# Altium PCB air_quality_monitoring.PcbDoc
Units mm, origin at the board's own origin, x right, y up, seen from the top; angles counter-clockwise.
Board outline 101.85 x 104.27 mm, 2 copper layers (Top Layer, Bottom Layer); 20 components, 17 nets, 161 pads, 6 vias.
Unrouted connection lines stored in the file: 1.
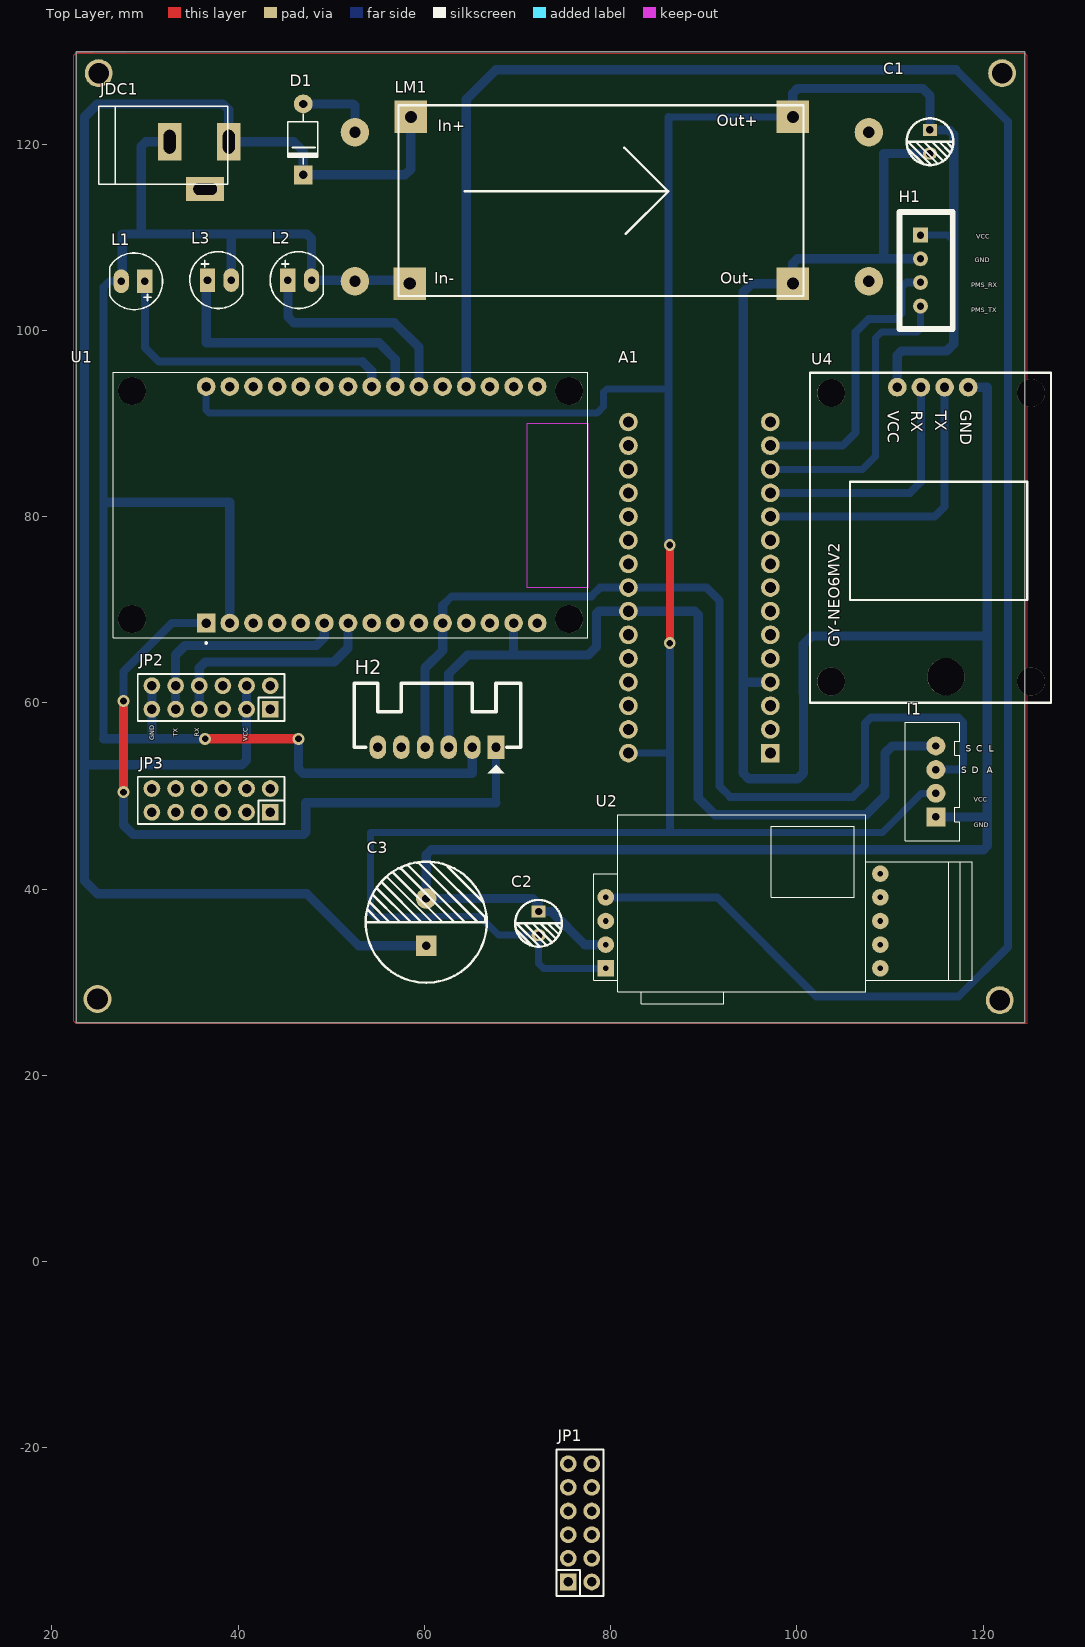
[diagram p0: Top Layer view]
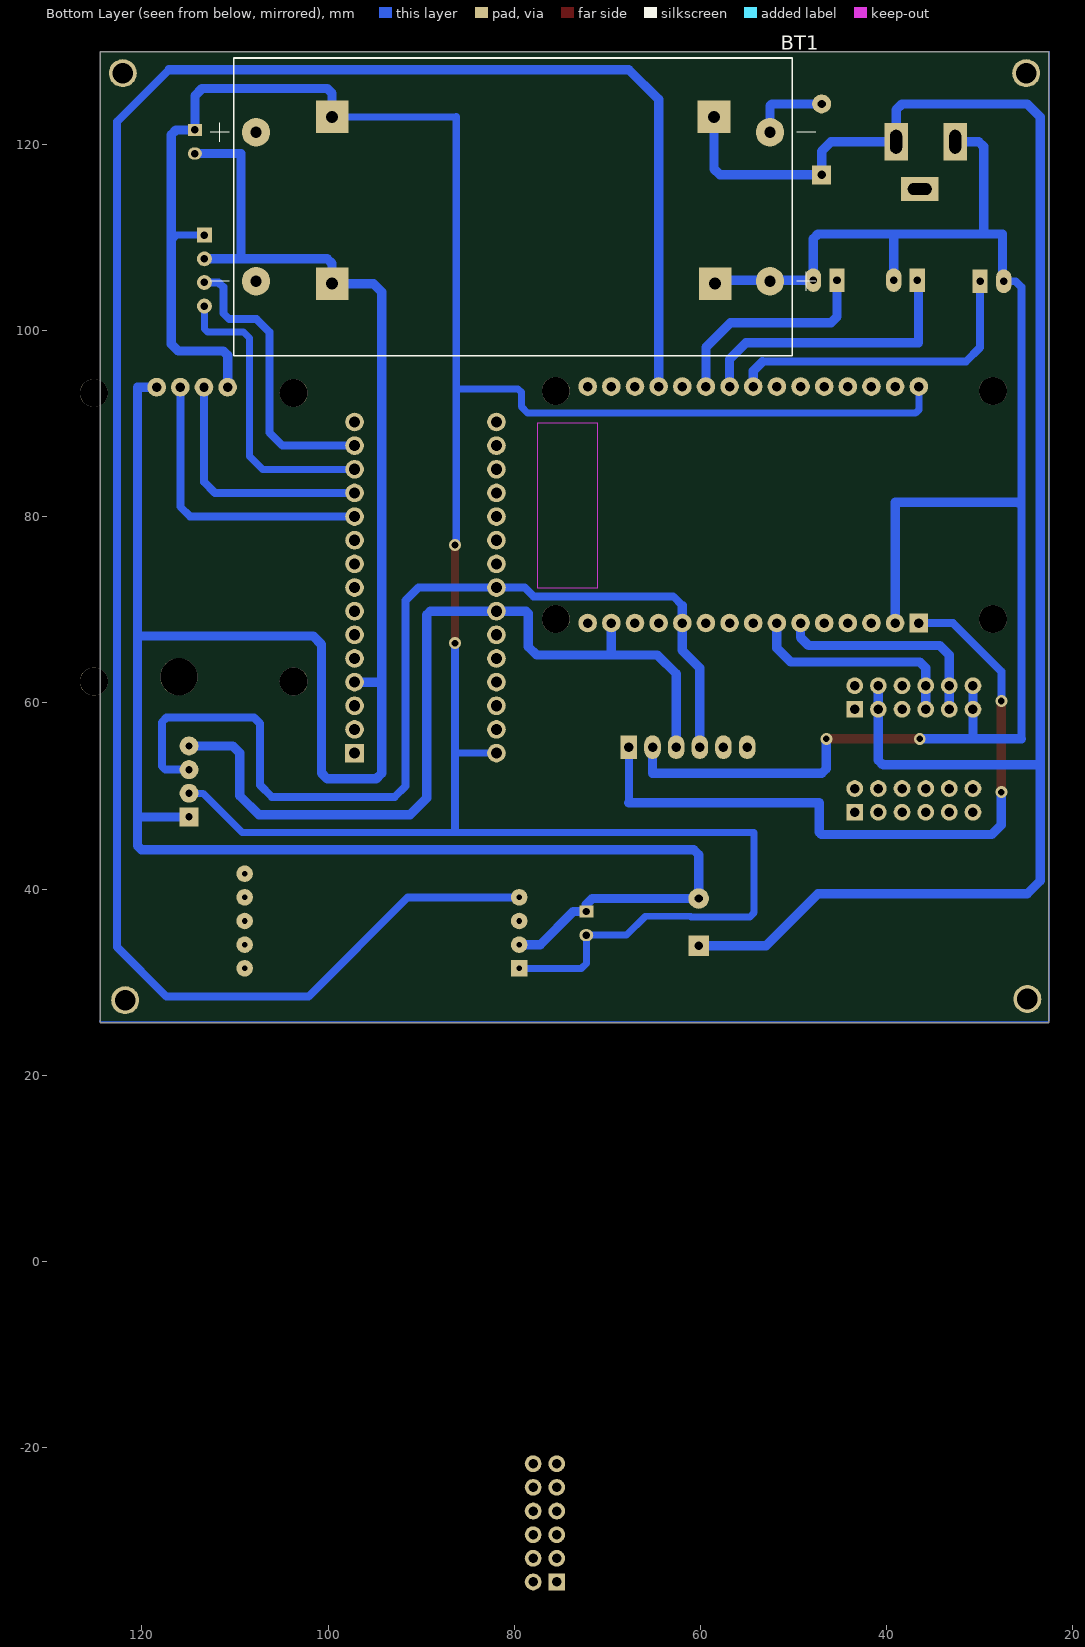
[diagram p1: Bottom Layer view, seen from below]

## Layer stack, top to bottom
Top Solder: solder mask 0.0102, Solder Resist, Dk 3.5
Top Layer: signal copper 0.0356
Dielectric 1: dielectric 0.32, FR-4, Dk 4.8
Bottom Layer: signal copper 0.0356
Bottom Solder: solder mask 0.0102, Solder Resist, Dk 3.5

## Board outline
22.606,25.654 124.46,25.654 124.46,129.921 22.606,129.921

## Design rules (kind name [scope] priority, off if disabled: settings)
Clearance [All] p1: gap=1 ignorepadtopadclearanceinfootprint=FALSE
PolygonConnect [All] p1: connectstyle=Relief reliefconductorwidth=0.254 reliefentries=4 polygonreliefangle="90 Angle" airgapwidth=0.254
RoutingVias [All] p1: holewidth=0.711 width=1.27 viastyle="Through Hole" minholewidth=0.711 minwidth=1.27 maxholewidth=0.711 maxwidth=1.27
SolderMaskExpansion [All] p1: expansion=0.102
Width [All] p1: maxlimit=1 minlimit=0.75 preferedwidth=0.85
30 further rules are at their usual default settings.

## Classes and differential pairs
component class Sheet1: A1 BT1 C1 C2 C3 D1 H2 I1 JDC1 JP2 L1 L2 L3 LM1 U1 U2 U4

## Components (designator, comment, footprint, x,y, rotation, side; value= is the part's Value field where it differs from the comment)
A1 "Arduino Nano" "Arduino Nano" 103.505,52.832 r90 top
BT1 "18650" "DE PIN 18650 X2" 80.137,113.284 r180 bottom
C1 "1000uF" "tu hoa 5mm" 114.3,120.269 r270 top
C2 "100uF" "tu hoa 5mm" 72.263,36.322 r270 top
C3 "1000uF" "tu hoa 13mm" 60.198,36.449 r90 top
D1 "100v" "DIODE 1A" 46.99,125.603 r90 top
H1 "PMS7003" XH2.54M-4 113.284,110.236 r270 top
H2 "BMP280" "Header 6P DC 2.54" 67.691,55.245 r90 top
I1 "LCD" "HEADER 4" 114.935,47.752 r90 top
JDC1 "Jac DC" DC-IN 35.814,117.729 r0 top
JP1 "AC7682S" "JP 2x6 CT" 76.708,-28.067 r90 top
JP2 "AC7682S" "JP 2x6 CT" 37.084,60.579 r180 top
JP3 "AC7682S" "JP 2x6 CT" 37.084,49.53 r180 top (schematic designator JP2)
L1 "LED 5mm" LED-5MM-BLUE 28.829,105.283 r180 top
L2 "LED 5mm" LED-5MM-BLUE 46.482,105.41 r0 top
L3 "LED 5mm" LED-5MM-BLUE 37.846,105.41 r0 top
LM1 "LM2596-Adj" lm2596 75.057,111.887 r0 top
U1 "DEVKIT_V1_ESP32-WROOM-32" MODULE_DEVKIT_V1_ESP32-WROOM-32 52.07,81.28 r90 top
U2 "MH-Z19B" MH-Z19B 79.477,31.496 r0 top
U4 "NEO6M" NEO6M 114.427,78.105 r180 top

## Footprints (in the part's own frame and the unit in brackets; to place one, negate y for a bottom-side part, rotate by r counter-clockwise, add the part's x,y. Pads: shape width x height; smd on the part's side, far side on the other; paste and mask are expansions set on the pad)
"Arduino Nano" [mm]
  rect 2x2 hole 1.2: 0(1.778,6.35)
  round 2 hole 1.2: 1(4.318,6.35) 2(6.858,6.35) 3(9.398,6.35) 4(11.938,6.35) 5(14.478,6.35) 6(17.018,6.35) 7(19.558,6.35) 8(22.098,6.35) 9(24.638,6.35) 10(27.178,6.35) 11(29.718,6.35) 12(32.258,6.35) 13(34.798,6.35) 14(37.338,6.35) 15(37.338,21.59) 16(34.798,21.59) 17(32.258,21.59) 18(29.718,21.59) 19(27.178,21.59) 20(24.638,21.59) 21(22.098,21.59) 22(19.558,21.59) 23(17.018,21.59) 24(14.478,21.59) 25(11.938,21.59) 26(9.398,21.59) 27(6.858,21.59) 28(4.318,21.59) 29(1.778,21.59)
  body extent -2.04,4.97 42.96,22.97, height 13.1
DC-IN [mil] "Jac DC input"
  rect 100x160 hole 50 slot 100 at 90 deg: 1(125,100) 2(-125,100)
  rect 160x100 hole 50 slot 100 at 0 deg: 3(25,-100)
  silkscreen extent -425,-80 120,250, body extent -410,-105 134,269, height 434
"DE PIN 18650 X2" [mil] "2-cell AA battery holder"
  round 120 hole 48: 1(-1086.61,314.96) 1(1086.61,314.96) 2(-1086.61,-314.96) 2(1086.61,-314.96)
  silkscreen extent -1280,-630 1280,630, body extent -1181,-630 1181,630, height 657
"DIODE 1A" [mil] "Diode 1A"
  round 80 hole 35: 1(-50,0)
  rect 80x80 hole 35: 2(-350,0)
  silkscreen extent -305,-61 -95,65, body extent -366,-61 -34,65, height 122
"HEADER 4" [mil]
  rect 80x80 hole 31.5: 1(0,0)
  round 80 hole 31.5: 2(100,0) 3(200,0) 4(300,0)
  silkscreen extent -100,-100 400,130, body extent -94,-92 394,134, height 276
"Header 6P DC 2.54" [mil]
  rect 100x70 hole 40: 1(0,0)
  oval 100x70 hole 40: 2(0,100) 3(0,200) 4(0,300) 5(0,400) 6(0,500)
  silkscreen extent -110,-105 270,600, body extent -7,-110 278,605, height 227
"JP 2x6 CT" [mm] "12 pins, dual row, straight, gold plating"
  rect 1.8x1.8 hole 1.02: 1(-6.35,1.27)
  round 1.8 hole 1.02: 2(-3.81,1.27) 3(-1.27,1.27) 4(1.27,1.27) 5(3.81,1.27) 6(6.35,1.27) 7(6.35,-1.27) 8(3.81,-1.27) 9(1.27,-1.27) 10(-1.27,-1.27) 11(-3.81,-1.27) 12(-6.35,-1.27)
  silkscreen extent -7.87,-2.54 7.87,2.54, body extent -7.87,-2.54 7.87,2.54, height 8.51
LED-5MM-BLUE [mil] "LED 2 PIN, 5 ly , Only colour, pin to pin 110mil"
  rect 65x100 hole 32: 1(-45,0)
  oval 65x100 hole 32: 2(55,0)
  silkscreen extent -120,-120 104,120, body extent -113,-120 100,117, height 339
lm2596 [mm]
  rect 3.5x3.5 hole 1.3: 1(-16.51,11.049) 2(-16.637,-6.858) 3(24.511,-6.858) 4(24.511,11.049)
  silkscreen extent -17.85,-8.18 25.65,12.32, body extent -17.81,-8.21 25.69,12.79, height 13.68
MH-Z19B [mil]
  round 70 hole 23.62: AOT(0,200) GND(0,100) HD(1161,400) PWM(0,300) RX(1161,100) SR(1161,300) TX(1161,200) VO(1161,0)
  rect 70x70 / inner round 70 / far side rect 70x70 hole 23.62: VIN(0,0)
  silkscreen extent -50,-150 1550,650, body extent 0,-346 1282,331, height 690
MODULE_DEVKIT_V1_ESP32-WROOM-32 [mm]
  rect 2x2 hole 1.02 mask+0.102: 1(-12.7,15.515)
  round 2 hole 1.02 mask+0.102: 2(-12.7,12.975) 3(-12.7,10.435) 4(-12.7,7.895) 5(-12.7,5.355) 6(-12.7,2.815) 7(-12.7,0.275) 8(-12.7,-2.265) 9(-12.7,-4.805) 10(-12.7,-7.345) 11(-12.7,-9.885) 12(-12.7,-12.425) 13(-12.7,-14.965) 14(-12.7,-17.505) 15(-12.7,-20.045) 16(12.7,-20.045) 17(12.7,-17.505) 18(12.7,-14.965) 19(12.7,-12.425) 20(12.7,-9.885) 21(12.7,-7.345) 22(12.7,-4.805) 23(12.7,-2.265) 24(12.7,0.275) 25(12.7,2.815) 26(12.7,5.355) 27(12.7,7.895) 28(12.7,10.435) 29(12.7,12.975) 30(12.7,15.515)
  round 3 hole 3 unplated mask+0: ""(-12.28,23.475) ""(-12.28,-23.475) ""(12.23,23.475) ""(12.23,-23.475)
  Keep-Out Layer region: 8.78,-25.475 -8.91,-25.475 -8.91,-18.985 8.78,-18.985
  Keep-Out Layer region: 8.78,-25.475 -8.91,-25.475 -8.91,-18.985 8.78,-18.985
  silkscreen extent -14.95,-25.48 14.23,25.48, body extent -13.97,-24.8 13.97,30.3, height 6.69
NEO6M [mm]
  round 2 hole 1 paste-2539.97 mask+0.051: 1(-3.983,-15.806) 2(-1.443,-15.806) 3(1.097,-15.806) 4(3.637,-15.806)
  round 3 hole 3 unplated paste-2539.97: ""(-10.732,15.806) ""(-10.731,-15.182) ""(10.731,15.806) ""(10.732,-15.182)
  round 4 hole 4 unplated paste-2539.97: ""(-1.588,15.298)
  silkscreen extent -12.87,-17.34 13.02,18.1, body extent -12.98,-17.47 13.1,18.13, height 13.42
"tu hoa 5mm" [mm]
  rect 1.3x1.5 hole 0.8: 1(-1.27,0)
  oval 1.3x1.5 hole 0.8: 2(1.27,0)
  silkscreen extent -2.51,-2.51 2.51,2.51, body extent -3.12,-3.18 3.23,3.18, height 14.55
"tu hoa 13mm" [mm]
  rect 2.2x2.2 hole 0.9: 1(-2.54,0)
  round 2.2 hole 0.9: 2(2.54,0)
  silkscreen extent -6.5,-6.5 6.5,6.5, body extent -6.25,-6.25 6.26,6.25, height 23.02
XH2.54M-4 [mm]
  rect 1.6x1.6 hole 0.8: 1(0,0)
  round 1.6 hole 0.8: 2(2.54,0) 3(5.08,0) 4(7.62,0)
  silkscreen extent -2.48,-2.26 10.1,3.46, body extent -2.48,-2.26 10.1,3.48, height 6.91

## Part data
BT1: library part "De Pin 18650 x2", "De Pin 18650 x2", Ma_Hang=MH010812, Ten="H?p Ð? Pin 18650 Hàn M?ch DP 18650-HM-02"
C1: library part "Tu Nhom 1000uF 16V", "Dán", Chung_Loai=Dán, Don_Vi=Con, Ma_Hang=MH004419, So_Chan=2, Ten_Linh_Kien="T? Nhôm 1000uF 16V 10x10MM"
C2: library part "Tu Hoa 100uF 16V 5x11", "C?m", Chung_Loai=C?m, Don_Vi=Con, Ma_Hang=MH008417, So_Chan=2, Ten_Linh_Kien="T? Hóa 100uF 16V 5x11MM"
C3: library part "Tu Hoa 1000uF 25V 13x21", "C?m", Chung_Loai=C?m, Don_Vi=Con, Ma_Hang=MH002315, So_Chan=2, Ten_Linh_Kien="T? Hóa 1000uF 25V 13x21MM"
D1: library part "Diode 1N4007", "C?m", Chung_Loai=C?m, Don_Vi=Con, Ma_Hang=MH001063, Ten_Linh_Kien="Diode 1N4007 1A (DIP)"
H1: library part "Header 4P 2.54 Duc Thang", "C?m", Chung_Loai=C?m, Don_Vi=Con, Ma_Hang=MH001285, Ten_Linh_Kien="Header 4P XH2.54-4P Ð?c Th?ng"
H2: library part "Header 6P 2.54 Duc Cong", "C?m", Chung_Loai=C?m, Don_Vi=Con, Ma_Hang=MH003363, Ten_Linh_Kien="Header 6P XH2.54-6P Ð?c Cong"
I1: library part "HEADER 4"
JDC1: library part DCIN, "Jac DC input"
JP1 JP2 JP3: library part "JP 2x6 2.54 Cai Thang", "C?m", Chung_Loai=C?m, Don_Vi=Con, Ma_Hang=MH008647, Ten_Linh_Kien="Jump Ðôi Cái 2.54MM 2x20P Th?ng"
L1 L2 L3: library part "LED 5mm Xanh Duong", "C?m", Chung_Loai=C?m, Don_Vi=Con, Ma_Hang=MH008987, Ten_Linh_Kien="Led 5MM Xanh Duong Ð?c (1000c)"
LM1: "Designed By @Alixahedi"
U1: "WROOM-32 Development Board ESP32 ESP-32S WiFi Bluetooth Dev Module", Package=Package, Check_prices=https://www.snapeda.com/parts/DEVKIT%20V1%20ESP32-WROOM-32/Do+it/view-part/?ref=eda, MF="Do it", MP="DEVKIT V1 ESP32-WROOM-32", SnapEDA_Link=https://www.snapeda.com/parts/DEVKIT%20V1%20ESP32-WROOM-32/Do+it/view-part/?ref=snap
U2: "Intelligent Infrared CO2 Module", Package=Package, Check_prices=https://www.snapeda.com/parts/MH-Z19B/Winsen/view-part/?ref=eda, MF=Winsen, MP=MH-Z19B, SnapEDA_Link=https://www.snapeda.com/parts/MH-Z19B/Winsen/view-part/?ref=snap

## Free pads (board coordinates)
  round 3 hole 2.22: 8(24.892,28.194) 8(25.019,127.635) 8(121.793,28.067) 8(122.047,127.635)

## Via types
v1: diameter 1.27, hole 0.711, Top Layer to Bottom Layer, 6 vias

## Nets (pads, with @x,y where several pads share a name; then routed paths per layer and width w, separated by ;. In a path a pad name is that pad's centre, name@x,y a point inside that pad or via, vN(x,y) a via of type N, cw(c..) or ccw(c..) an arc to the next point about the centre after c; other vN are vias at no path point)
+5: A1.29 C1.1 C2.2 H1.1 I1.2 LM1.4 U1.30 U2.VIN U4.4 | length 310.1
  Top Layer w0.85: v1(86.36,66.421) v1(86.36,76.962)
  Bottom Layer w0.75: U1.30 36.555,91.461 36.881,91.135 78.562,91.135 79.248,91.821 79.248,93.383 79.591,93.726 86.233,93.726 ; U2.VIN 72.771,31.496 72.263,32.004 C2.2 67.945,35.052 65.913,37.084 61.086,37.084 61.016,37.014 54.68,37.014 54.229,37.465 54.229,46.101 109.22,46.101 113.411,50.292 I1.2 ; A1.29 86.36,54.61 ; 86.233,122.936 LM1.4 ; H1.1 116.205,110.236 116.84,109.601
  Bottom Layer w0.85: 86.233,122.936 86.233,93.726 86.233,77.089 v1(86.36,76.962) ; 86.36,46.151 86.36,54.61 v1(86.36,66.421)
  Bottom Layer w1: LM1.4 99.568,125.476 100.076,125.984 113.538,125.984 114.3,125.222 C1.1 116.332,121.539 116.84,121.031 116.84,109.601 116.84,98.552 116.078,97.79 111.252,97.79 110.79,97.328 U4.4
+9: C3.1 D1.2 JDC1.1 JP2.2 JP2.11 LM1.1 | length 195.3
  Bottom Layer w1: 23.622,53.34 40.386,53.34 40.894,53.848 JP2.2 JP2.11 ; LM1.1 58.547,117.348 57.912,116.713 D1.2 46.99,119.253 45.974,120.269 JDC1.1 38.989,123.698 38.354,124.333 24.892,124.333 23.495,122.936 23.495,40.894 24.892,39.497 47.371,39.497 52.959,33.909 C3.1
CO2_PWM: U1.19 U2.PWM | length 231.1
  Bottom Layer w0.85: U2.PWM 91.44,39.116 102.108,28.448 117.348,28.448 122.682,33.782 122.682,122.428 117.094,128.016
  Bottom Layer w1: U1.19 64.495,124.82 67.691,128.016 117.094,128.016
GND: A1.3 BT1.2 C1.2 C2.1 C3.2 H1.2 H2.2 I1.1 JDC1.2 JP2.6 JP2.7 L1.2 L2.2 L3.2 LM1.2 LM1.3 U1.2 U1.29 U2.GND U4.1 | length 464.7
  Top Layer w1: v1(36.449,56.134) v1(46.482,56.134)
  Bottom Layer w0.85: 25.527,56.134 25.527,104.648 26.162,105.283 L1.2
  Bottom Layer w1: 25.527,56.134 30.734,56.134 ; 25.781,81.407 25.908,81.534 39.095,81.534 U1.2 ; L1.2 27.559,105.41 27.559,110.363 29.591,110.363 ; JP2.7 JP2.6 30.734,56.134 ; JDC1.2 30.099,120.269 29.591,119.761 29.591,110.363 ; v1(36.449,56.134) 30.734,56.134 ; L3.2 39.243,110.363 ; v1(46.482,56.134) 46.482,52.938 46.969,52.451 65.151,52.451 H2.2 ; LM1.2 58.039,105.41 L2.2 47.879,109.855 47.371,110.363 39.243,110.363 ; U2.GND 77.216,34.036 73.66,37.592 C2.1 72.263,38.354 71.628,38.989 C3.2 60.198,43.688 60.736,44.226 120.045,44.226 120.465,44.646 120.465,47.752 ; A1.3 94.361,62.23 94.234,62.103 ; H1.2 109.22,107.696 ; C1.2 109.347,118.999 109.347,107.823 109.22,107.696 ; I1.1 120.465,47.752 ; U4.1 120.465,93.911 120.465,67.183 ; 29.591,110.363 39.243,110.363 ; 94.234,62.103 94.234,104.14 95.123,105.029 LM1.3 99.568,107.188 100.076,107.696 109.22,107.696 ; 94.234,62.103 94.234,52.451 94.849,51.836 100.076,51.836 100.711,52.471 100.711,61.041 100.696,61.056 100.696,66.279 101.6,67.183 120.465,67.183 ; 120.465,47.752 120.465,67.183
GPS_RX: A1.11 U4.3 | length 26.8
  Bottom Layer w0.85: A1.11 112.141,82.55 113.33,83.739 U4.3
GPS_TX: A1.10 U4.2 | length 32
  Bottom Layer w0.85: A1.10 114.808,80.01 115.87,81.072 U4.2
LED_E: L3.1 U1.22 | length 30.8
  Bottom Layer w1: L3.1 36.576,105.283 36.576,98.679 55.118,98.679 56.875,96.922 U1.22
LED_G: L2.1 U1.21 | length 23.6
  Bottom Layer w1: L2.1 45.339,101.473 45.974,100.838 56.769,100.838 59.415,98.192 U1.21
LED_S: L1.1 U1.23 | length 34.2
  Bottom Layer w0.85: L1.1 29.972,98.171 31.496,96.647 53.34,96.647
  Bottom Layer w1: 53.34,96.647 54.335,95.652 U1.23
NetBT1_1: BT1.1 D1.1 | length 8.1
  Bottom Layer w1: D1.1 52.324,124.333 52.537,124.12 BT1.1@52.537,121.665
PMS_RX: A1.13 H1.3 | length 31.3
  Bottom Layer w0.85: A1.13 104.902,87.63 106.299,89.027 106.299,99.822 107.696,101.219 110.617,101.219 111.252,101.854 111.252,104.648 111.76,105.156 H1.3
PMS_TX: A1.12 H1.4 | length 32.3
  Bottom Layer w0.75: A1.12 107.061,85.09 108.458,86.487 108.458,99.187 109.093,99.822 112.949,99.822 113.284,100.157 H1.4
RX: JP2.4 JP2.9 U1.7 | length 24
  Bottom Layer w1: JP2.4 JP2.9 35.814,63.754 36.449,64.389 50.292,64.389 51.795,65.892 U1.7
SCL: A1.23 H2.3 I1.4 U1.14 | length 94.8
  Bottom Layer w1: H2.3 62.611,63.119 64.643,65.151 69.575,65.151 ; U1.14 69.575,65.151 ; I1.4 110.236,55.372 109.474,54.61 109.474,50.038 107.422,47.986 91.206,47.986 89.408,49.784 89.408,69.469 89.027,69.85 A1.23 78.74,69.85 78.486,69.596 78.486,66.04 77.597,65.151 69.575,65.151
SDA: A1.22 H2.4 I1.3 U1.11 | length 109.1
  Bottom Layer w0.85: 61.955,70.464 62.936,71.445 77.928,71.445 78.873,72.39 A1.22 90.297,72.39 91.694,70.993 91.694,51.054 92.837,49.911 106.045,49.911 107.315,51.181 107.315,57.785 107.95,58.42 117.348,58.42 117.856,57.912 117.856,53.213 117.475,52.832 I1.3
  Bottom Layer w1: H2.4 60.071,63.754 61.955,65.638 U1.11 61.955,70.464
TX: JP2.5 JP2.8 U1.6 | length 24.1
  Bottom Layer w1: JP2.5 JP2.8 33.274,65.151 34.29,66.167 48.387,66.167 49.255,67.035 U1.6
VCC: H2.1 U1.1 | length 77.2
  Top Layer w1: v1(27.686,50.419) v1(27.686,60.198)
  Bottom Layer w0.85: v1(27.686,60.198) 27.686,63.373 32.893,68.58 U1.1 ; 67.691,49.276 H2.1
  Bottom Layer w1: v1(27.686,50.419) 27.686,46.889 28.715,45.86 47.003,45.86 47.244,46.101 47.244,49.276 67.691,49.276
pads on no net: A1.0 A1.1 A1.2 A1.4 A1.5 A1.6 A1.7 A1.8 A1.9 A1.14 A1.15 A1.16 A1.17 A1.18 A1.19 A1.20 A1.21 A1.24 A1.25 A1.26 A1.27 A1.28 H2.5 H2.6 JDC1.3 JP1.1 JP1.2 JP1.3 JP1.4 JP1.5 JP1.6 JP1.7 JP1.8 JP1.9 JP1.10 JP1.11 JP1.12 JP2.1 JP2.3 JP2.10 JP2.12 JP3.1 JP3.2 JP3.3 JP3.4 JP3.5 JP3.6 JP3.7 JP3.8 JP3.9 JP3.10 JP3.11 JP3.12 U1. U1.3 U1.4 U1.5 U1.8 U1.9 U1.10 U1.12 U1.13 U1.15 U1.16 U1.17 U1.18 U1.20 U1.24 U1.25 U1.26 U1.27 U1.28 U2.AOT U2.HD U2.RX U2.SR U2.TX U2.VO U4.

## Polygon pours and split planes (outlines as drawn)
GND on Bottom Layer "NONET_L02_P000" (solid, remove dead copper, shelved, pour order 0): 124.46,129.921 124.46,25.908 124.587,25.781 22.606,25.781 22.479,25.908 22.479,129.921
GND on Top Layer "NONET_L01_P001" (solid, remove dead copper, shelved, pour order 1): 22.479,129.794 124.46,129.794 124.714,129.54 124.714,25.527 22.606,25.527 22.352,25.781 22.352,129.54 22.733,129.921 27.94,129.921

## Silkscreen, mask and mechanical layers (free items; w line width, h text height)
Top Overlay:
  text "VCC" at 119.253,109.855 h0.5
  text "GND" at 119.126,107.315 h0.5
  text "PMS_RX" at 118.745,104.648 h0.5
  text "PMS_TX" at 118.745,101.981 h0.5
  text "TX" at 33.528,56.388 h0.5 r90
  text "RX" at 35.814,56.388 h0.5 r90
  text "GND" at 30.988,56.007 h0.5 r90
  text "VCC" at 41.021,55.88 h0.5 r90
  text "L" at 120.609,54.503 h1.2
  text "S" at 118.168,54.483 h1.2
  text "C" at 119.253,54.483 h1.2
  text "D" at 118.77,52.197 h1.2
  text "A" at 120.396,52.197 h1.2
  text "S" at 117.684,52.177 h1.2
  text "VCC" at 118.999,49.403 h0.5
  text "GND" at 118.978,46.644 h0.5
Mechanical 1:
  lines w0.254: 22.479,25.146 124.968,25.146 124.968,130.175 22.479,130.175 22.479,25.146

## Text inside footprints (layer, text, board x,y; h text height)
LM1: Top Overlay "In+" at 61.417,121.412 h1.2; Top Overlay "In-" at 61.036,105.029 h1.2; Top Overlay "Out-" at 91.77,105.029 h1.2; Top Overlay "Out+" at 91.389,121.92 h1.2
U4: Top Overlay "TX" at 114.854,91.371 h1.2 r270; Top Overlay "VCC" at 109.774,91.371 h1.2 r270; Top Overlay "RX" at 112.314,91.371 h1.2 r270; Top Overlay "GY-NEO6MV2" at 104.625,65.971 h1.2 r90; Top Overlay "GND" at 117.556,91.483 h1.2 r270